# Altium PCB Aquarium_LED_Driver.PcbDoc
Units mil, origin at the board's own origin, x right, y up, seen from the top; angles counter-clockwise.
Board outline 3670 x 2255 mil, 2 copper layers (Top Layer, Bottom Layer); 96 components, 64 nets, 255 pads, 183 vias.
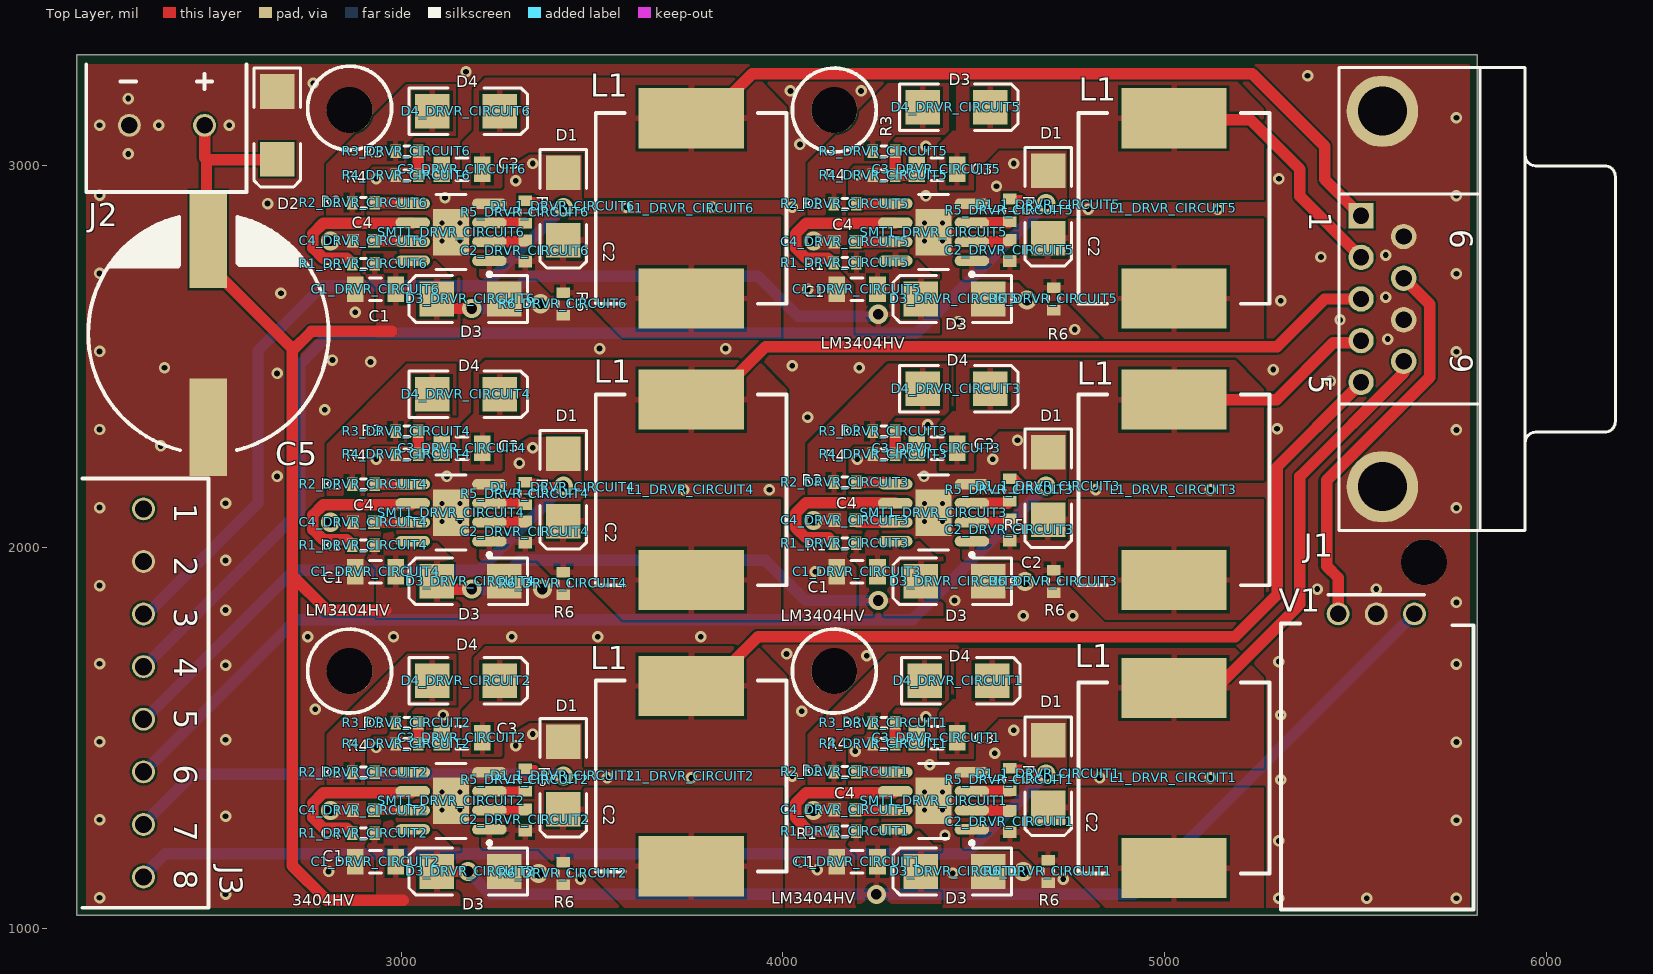
[diagram p0: Top Layer view]
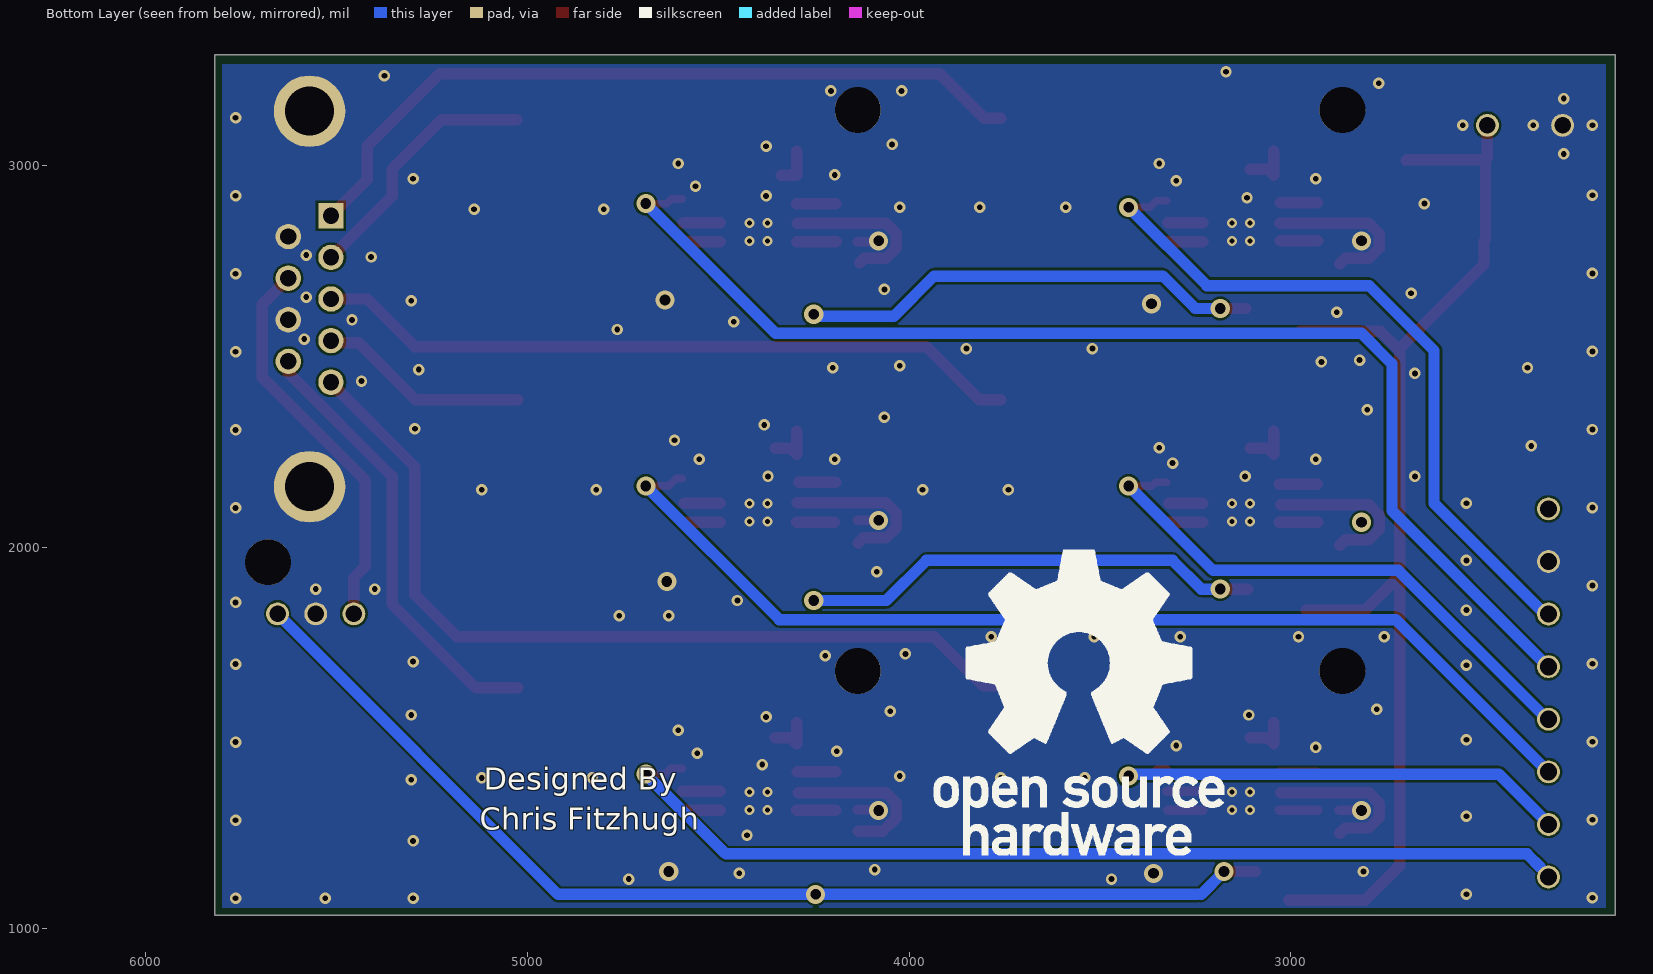
[diagram p1: Bottom Layer view, seen from below]

## Layer stack, top to bottom
Top Layer: signal copper 1.4
Dielectric: dielectric 12.6, FR-4, Dk 4.8
Bottom Layer: signal copper 1.4

## Board outline
2150,3290 2150,1035 5820,1035 5820,3290

## Design rules (kind name [scope] priority, off if disabled: settings)
Clearance "Stitching GND" [IsStitchingVia and InNet('GND') vs (IsVia and (Not IsStitchingVia)) Or IsPad] p1: gap=10
Clearance [All] p2: gap=6
PlaneConnect [All] p1: planeconnectstyle=Direct reliefexpansion=20 reliefentries=4 reliefconductorwidth=10 reliefairgap=10
PolygonConnect PolygonConnect_GND [InNet('GND') vs InNet('GND')] p1: connectstyle=Direct reliefconductorwidth=10 reliefentries=4 polygonreliefangle="90 Angle" airgapwidth=10
PolygonConnect [All] p2: connectstyle=Relief reliefconductorwidth=15 reliefentries=4 polygonreliefangle="90 Angle" airgapwidth=8
RoomDefinition Aquarium_LED_Driver [InComponentClass('Aquarium_LED_Driver')] p1: confinementstyle=ConfineIn formatcopy=TRUE lockcomponents=FALSE outline 2150,1035 6215,1035 6215,3290 2150,3290
RoomDefinition DRVR_CIRCUIT2 [InComponentClass('DRVR_CIRCUIT2')] p2: confinementstyle=ConfineIn formatcopy=TRUE lockcomponents=FALSE outline 4020,1074.96 4020,1750 2755,1750 2755,1074.96
RoomDefinition DRVR_CIRCUIT4 [InComponentClass('DRVR_CIRCUIT4')] p3: confinementstyle=ConfineIn formatcopy=TRUE lockcomponents=FALSE outline 4020,1810 4020,2479.96 2755,2479.96 2755,1810
RoomDefinition DRVR_CIRCUIT3 [InComponentClass('DRVR_CIRCUIT3')] p4: confinementstyle=ConfineIn formatcopy=TRUE lockcomponents=FALSE outline 5285,1814.96 5285,2479.96 4020,2479.96 4020,1814.96
RoomDefinition DRVR_CIRCUIT1 [InComponentClass('DRVR_CIRCUIT1')] p5: confinementstyle=ConfineIn formatcopy=TRUE lockcomponents=FALSE outline 5285,1074.96 5285,1719.96 4020,1719.96 4020,1074.96
RoomDefinition DRVR_CIRCUIT6 [InComponentClass('DRVR_CIRCUIT6')] p6: confinementstyle=ConfineIn formatcopy=TRUE lockcomponents=FALSE outline 4020,2562.4 4020,3264.96 2750,3264.96 2750,2562.4
RoomDefinition DRVR_CIRCUIT5 [InComponentClass('DRVR_CIRCUIT5')] p7: confinementstyle=ConfineIn formatcopy=TRUE lockcomponents=FALSE outline 5285,2562.4 5285,3264.96 4020,3264.96 4020,2562.4
RoutingTopology [All] p1: topology=Horizontal
RoutingVias [All] p1: holewidth=28 width=50 viastyle="Through Hole" minholewidth=13 minwidth=30 maxholewidth=40 maxwidth=70
SolderMaskExpansion [All] p1: expansion=4
Width [All] p1: maxlimit=40 minlimit=6 preferedwidth=10 minimp=50.000000 maximp=50.000000 favimp=50.000000
26 further rules are at their usual default settings.

## Classes and differential pairs
channel class DRVR_CIRCUIT: DRVR_CIRCUIT1 DRVR_CIRCUIT2 DRVR_CIRCUIT3 DRVR_CIRCUIT4 DRVR_CIRCUIT5 DRVR_CIRCUIT6
net class LED[1..6]: LED1 LED2 LED3 LED4 LED5 LED6
net class DIM[1..6]: DIM1 DIM2 DIM3 DIM4 DIM5 DIM6
component class DRVR_CIRCUIT6: C1_DRVR_CIRCUIT6 C2_DRVR_CIRCUIT6 C3_DRVR_CIRCUIT6 C4_DRVR_CIRCUIT6 D1_1_DRVR_CIRCUIT6 D3_DRVR_CIRCUIT6 D4_DRVR_CIRCUIT6 L1_DRVR_CIRCUIT6 R1_DRVR_CIRCUIT6 R2_DRVR_CIRCUIT6 R3_DRVR_CIRCUIT6 R4_DRVR_CIRCUIT6 R5_DRVR_CIRCUIT6 R6_DRVR_CIRCUIT6 SMT1_DRVR_CIRCUIT6
component class DRVR_CIRCUIT5: C1_DRVR_CIRCUIT5 C2_DRVR_CIRCUIT5 C3_DRVR_CIRCUIT5 C4_DRVR_CIRCUIT5 D1_1_DRVR_CIRCUIT5 D3_DRVR_CIRCUIT5 D4_DRVR_CIRCUIT5 L1_DRVR_CIRCUIT5 R1_DRVR_CIRCUIT5 R2_DRVR_CIRCUIT5 R3_DRVR_CIRCUIT5 R4_DRVR_CIRCUIT5 R5_DRVR_CIRCUIT5 R6_DRVR_CIRCUIT5 SMT1_DRVR_CIRCUIT5
component class DRVR_CIRCUIT4: C3_DRVR_CIRCUIT4 D1_1_DRVR_CIRCUIT4 D4_DRVR_CIRCUIT4 L1_DRVR_CIRCUIT4 R3_DRVR_CIRCUIT4 R4_DRVR_CIRCUIT4
component class DRVR_CIRCUIT3: C1_DRVR_CIRCUIT3 C2_DRVR_CIRCUIT3 C3_DRVR_CIRCUIT3 C4_DRVR_CIRCUIT3 D1_1_DRVR_CIRCUIT3 D3_DRVR_CIRCUIT3 D4_DRVR_CIRCUIT3 L1_DRVR_CIRCUIT3 R1_DRVR_CIRCUIT3 R2_DRVR_CIRCUIT3 R3_DRVR_CIRCUIT3 R4_DRVR_CIRCUIT3 R5_DRVR_CIRCUIT3 R6_DRVR_CIRCUIT3 SMT1_DRVR_CIRCUIT3
component class DRVR_CIRCUIT1: C1_DRVR_CIRCUIT1 C2_DRVR_CIRCUIT1 C3_DRVR_CIRCUIT1 C4_DRVR_CIRCUIT1 D1_1_DRVR_CIRCUIT1 D3_DRVR_CIRCUIT1 D4_DRVR_CIRCUIT1 L1_DRVR_CIRCUIT1 R1_DRVR_CIRCUIT1 R2_DRVR_CIRCUIT1 R3_DRVR_CIRCUIT1 R4_DRVR_CIRCUIT1 R5_DRVR_CIRCUIT1 R6_DRVR_CIRCUIT1 SMT1_DRVR_CIRCUIT1
component class Aquarium_LED_Driver: C5 D2 J1 J2 J3 V1

## Components (designator, comment, footprint, x,y, rotation, side; value= is the part's Value field where it differs from the comment)
C1_DRVR_CIRCUIT1 "C1" C1206 4195,1175.55 r0 top (schematic designator C1)
C1_DRVR_CIRCUIT2 "C1" C1206 2932.99,1175.55 r0 top (schematic designator C1)
C1_DRVR_CIRCUIT3 "C1" C1206 4195,1935.55 r0 top (schematic designator C1)
C1_DRVR_CIRCUIT4 "C1" C1206 2932.99,1935.55 r0 top (schematic designator C1)
C1_DRVR_CIRCUIT5 "C1" C1206 4195,2675.55 r0 top (schematic designator C1)
C1_DRVR_CIRCUIT6 "C1" C1206 2932.99,2675.55 r0 top (schematic designator C1)
C2_DRVR_CIRCUIT1 "C2" 1608[0603] 4595,1280.43 r270 top (schematic designator C2)
C2_DRVR_CIRCUIT2 "C2" 1608[0603] 3325,1284.96 r270 top (schematic designator C2)
C2_DRVR_CIRCUIT3 "C2" 1608[0603] 4595,2044.96 r270 top (schematic designator C2)
C2_DRVR_CIRCUIT4 "C2" 1608[0603] 3325,2039.96 r270 top (schematic designator C2)
C2_DRVR_CIRCUIT5 "C2" 1608[0603] 4595,2777.4 r270 top (schematic designator C2)
C2_DRVR_CIRCUIT6 "C2" 1608[0603] 3325,2776.26 r270 top (schematic designator C2)
C3_DRVR_CIRCUIT1 "C3" C1206 4403.58,1499.96 r0 top (schematic designator C3)
C3_DRVR_CIRCUIT2 "C3" C1206 3160,1499.96 r0 top (schematic designator C3)
C3_DRVR_CIRCUIT3 "C3" C1206 4403.58,2258.54 r0 top (schematic designator C3)
C3_DRVR_CIRCUIT4 "C3" C1206 3160,2258.54 r0 top (schematic designator C3)
C3_DRVR_CIRCUIT5 "C3" C1206 4403.58,2989.96 r0 top (schematic designator C3)
C3_DRVR_CIRCUIT6 "C3" C1206 3160,2989.96 r0 top (schematic designator C3)
C4_DRVR_CIRCUIT1 "C4" 1608[0603] 4163.5,1311.38 r0 top (schematic designator C4)
C4_DRVR_CIRCUIT2 "C4" 1608[0603] 2901.5,1309.96 r0 top (schematic designator C4)
C4_DRVR_CIRCUIT3 "C4" 1608[0603] 4163.5,2069.96 r0 top (schematic designator C4)
C4_DRVR_CIRCUIT4 "C4" 1608[0603] 2901.5,2064.96 r0 top (schematic designator C4)
C4_DRVR_CIRCUIT5 "C4" 1608[0603] 4163.5,2799.96 r0 top (schematic designator C4)
C4_DRVR_CIRCUIT6 "C4" 1608[0603] 2901.5,2802.4 r0 top (schematic designator C4)
C5 "EEV-FK1H102M" EEV-FK1H102M 2495,2560 r0 top
D1_1_DRVR_CIRCUIT1 "D1" SMB 4695,1405.43 r270 top (schematic designator D1_1)
D1_1_DRVR_CIRCUIT2 "D1" SMB 3425,1401.1 r270 top (schematic designator D1_1)
D1_1_DRVR_CIRCUIT3 "D1" SMB 4695,2159.96 r270 top (schematic designator D1_1)
D1_1_DRVR_CIRCUIT4 "D1" SMB 3425,2156.1 r270 top (schematic designator D1_1)
D1_1_DRVR_CIRCUIT5 "D1" SMB 4695,2897.4 r270 top (schematic designator D1_1)
D1_1_DRVR_CIRCUIT6 "D1" SMB 3425,2892.4 r270 top (schematic designator D1_1)
D2 "Tranzorb" SMB 2675,3105 r270 top
D3_DRVR_CIRCUIT1 "D3" SMB 4450,1149.96 r180 top (schematic designator D3)
D3_DRVR_CIRCUIT2 "D3" SMB 3181.81,1149.96 r180 top (schematic designator D3)
D3_DRVR_CIRCUIT3 "D3" SMB 4450,1909.96 r180 top (schematic designator D3)
D3_DRVR_CIRCUIT4 "D3" SMB 3181.81,1909.96 r180 top (schematic designator D3)
D3_DRVR_CIRCUIT5 "D3" SMB 4450,2649.96 r180 top (schematic designator D3)
D3_DRVR_CIRCUIT6 "D3" SMB 3181.81,2649.96 r180 top (schematic designator D3)
D4_DRVR_CIRCUIT1 "D4" SMB 4460,1649.96 r0 top (schematic designator D4)
D4_DRVR_CIRCUIT2 "D4" SMB 3170,1649.96 r0 top (schematic designator D4)
D4_DRVR_CIRCUIT3 "D4" SMB 4455,2414.96 r0 top (schematic designator D4)
D4_DRVR_CIRCUIT4 "D4" SMB 3170,2399.96 r0 top (schematic designator D4)
D4_DRVR_CIRCUIT5 "D3" SMB 4455,3152.4 r0 top (schematic designator D4)
D4_DRVR_CIRCUIT6 "D4" SMB 3170,3142.4 r0 top (schematic designator D4)
J1 "D Connector 9" DSUB1.385-2H9 5945,2650 r270 top
J2 "282836-2" 282836-2 2485,3105 r180 top
J3 "284391-8" 284391-8 2325,2100 r270 top
L1_DRVR_CIRCUIT1 "L1" SRR1208-151YLCT-ND 5025,1394.96 r90 top (schematic designator L1)
L1_DRVR_CIRCUIT2 "L1" SRR1208-151YLCT-ND 3760,1399.96 r90 top (schematic designator L1)
L1_DRVR_CIRCUIT3 "L1" SRR1208-151YLCT-ND 5025,2149.96 r90 top (schematic designator L1)
L1_DRVR_CIRCUIT4 "L1" SRR1208-151YLCT-ND 3760,2149.96 r90 top (schematic designator L1)
L1_DRVR_CIRCUIT5 "L1" SRR1208-151YLCT-ND 5025,2887.4 r90 top (schematic designator L1)
L1_DRVR_CIRCUIT6 "L1" SRR1208-151YLCT-ND 3760,2887.4 r90 top (schematic designator L1)
R1_DRVR_CIRCUIT1 "R1" J1-0603 4163.5,1254.96 r0 top (schematic designator R1)
R1_DRVR_CIRCUIT2 "R1" J1-0603 2901.5,1249.96 r0 top (schematic designator R1)
R1_DRVR_CIRCUIT3 "R1" J1-0603 4163.5,2009.96 r0 top (schematic designator R1)
R1_DRVR_CIRCUIT4 "R1" J1-0603 2901.5,2004.96 r0 top (schematic designator R1)
R1_DRVR_CIRCUIT5 "R1" J1-0603 4163.5,2745 r0 top (schematic designator R1)
R1_DRVR_CIRCUIT6 "R1" J1-0603 2901.5,2742.4 r0 top (schematic designator R1)
R2_DRVR_CIRCUIT1 "R2" J1-0603 4163.5,1411.38 r180 top (schematic designator R2)
R2_DRVR_CIRCUIT2 "R2" J1-0603 2901.5,1409.96 r180 top (schematic designator R2)
R2_DRVR_CIRCUIT3 "R2" J1-0603 4163.5,2169.96 r180 top (schematic designator R2)
R2_DRVR_CIRCUIT4 "R2" J1-0603 2901.5,2164.96 r180 top (schematic designator R2)
R2_DRVR_CIRCUIT5 "R2" J1-0603 4163.5,2899.96 r180 top (schematic designator R2)
R2_DRVR_CIRCUIT6 "R2" J1-0603 2901.5,2902.4 r180 top (schematic designator R2)
R3_DRVR_CIRCUIT1 "R3" J1-0603 4265,1539.96 r0 top (schematic designator R3)
R3_DRVR_CIRCUIT2 "R3" J1-0603 3015,1539.96 r0 top (schematic designator R3)
R3_DRVR_CIRCUIT3 "R3" J1-0603 4265,2303.54 r0 top (schematic designator R3)
R3_DRVR_CIRCUIT4 "R3" J1-0603 3015,2303.54 r0 top (schematic designator R3)
R3_DRVR_CIRCUIT5 "R3" J1-0603 4265,3037.4 r0 top (schematic designator R3)
R3_DRVR_CIRCUIT6 "R3" J1-0603 3015,3037.4 r0 top (schematic designator R3)
R4_DRVR_CIRCUIT1 "R4" J1-0603 4265,1484.21 r0 top (schematic designator R4)
R4_DRVR_CIRCUIT2 "R4" J1-0603 3015,1484.21 r0 top (schematic designator R4)
R4_DRVR_CIRCUIT3 "R4" J1-0603 4265,2242.79 r0 top (schematic designator R4)
R4_DRVR_CIRCUIT4 "R4" J1-0603 3015,2242.79 r0 top (schematic designator R4)
R4_DRVR_CIRCUIT5 "R4" J1-0603 4265,2974.21 r0 top (schematic designator R4)
R4_DRVR_CIRCUIT6 "R4" J1-0603 3015,2974.21 r0 top (schematic designator R4)
R5_DRVR_CIRCUIT1 "R5" J1-0603 4595,1390.43 r90 top (schematic designator R5)
R5_DRVR_CIRCUIT2 "R5" J1-0603 3325,1389.96 r90 top (schematic designator R5)
R5_DRVR_CIRCUIT3 "R5" J1-0603 4595,2149.96 r90 top (schematic designator R5)
R5_DRVR_CIRCUIT4 "R5" J1-0603 3325,2139.96 r90 top (schematic designator R5)
R5_DRVR_CIRCUIT5 "R5" J1-0603 4595,2882.4 r90 top (schematic designator R5)
R5_DRVR_CIRCUIT6 "R5" J1-0603 3325,2877.4 r90 top (schematic designator R5)
R6_DRVR_CIRCUIT1 "R6" J1-0603 4695,1149.96 r90 top (schematic designator R6)
R6_DRVR_CIRCUIT2 "R6" J1-0603 3425,1144.96 r90 top (schematic designator R6)
R6_DRVR_CIRCUIT3 "R6" J1-0603 4710,1909.96 r90 top (schematic designator R6)
R6_DRVR_CIRCUIT4 "R6" J1-0603 3425,1904.96 r90 top (schematic designator R6)
R6_DRVR_CIRCUIT5 "R6" J1-0603 4710,2649.96 r90 top (schematic designator R6)
R6_DRVR_CIRCUIT6 "R6" J1-0603 3425,2637.4 r90 top (schematic designator R6)
SMT1_DRVR_CIRCUIT1 "LM3404HV" MRA08B_M 4395,1335.08 r180 top (schematic designator SMT1)
SMT1_DRVR_CIRCUIT2 "3404HV" MRA08B_M 3131.02,1335.08 r180 top (schematic designator SMT1)
SMT1_DRVR_CIRCUIT3 "LM3404HV" MRA08B_M 4395,2090.08 r180 top (schematic designator SMT1)
SMT1_DRVR_CIRCUIT4 "LM3404HV" MRA08B_M 3131.02,2090.08 r180 top (schematic designator SMT1)
SMT1_DRVR_CIRCUIT5 "LM3404HV" MRA08B_M 4395,2825.08 r180 top (schematic designator SMT1)
SMT1_DRVR_CIRCUIT6 "LM3404HVMR/NOPB" MRA08B_M 3131.02,2825.08 r180 top (schematic designator SMT1)
V1 "V7812W-500R" V7812W-500R 5555,1825 r0 top

## Footprints (in the part's own frame and the unit in brackets; to place one, negate y for a bottom-side part, rotate by r counter-clockwise, add the part's x,y. Pads: shape width x height; smd on the part's side, far side on the other; paste and mask are expansions set on the pad)
1608[0603] [mm] "Chip Capacitor, Body 1.6x0.8mm, IPC High Density"
  rect 0.8x0.9 smd: 1(-0.7,0) 2(0.7,0)
  body extent -0.87,-0.48 0.87,0.48, height 1.3
282836-2 [mil] "Board Mount w/Interlock,  Low Profile,  5.0 mm Centerline,  Side Wire Entry"
  round 60 hole 43: 1(0,0) 2(197,0)
  silkscreen extent -110,-160 310,175, body extent -95,-160 295,160, height 394
284391-8 [mil] "8-Pos Eurostyle Terminal Block"
  round 60 hole 45.28: 1(0,0) 2(137.8,0) 3(275.59,0) 4(413.39,0) 5(551.18,0) 6(688.98,0) 7(826.77,0) 8(964.57,0)
  silkscreen extent -80,-160 1045,170, body extent -75,-160 1040,165, height 496
C1206 [mm] "Chip Capacitor, Body 3.2x1.6mm, IPC High Density"
  rect 1.1x1.7 smd: 1(-1.35,0) 2(1.35,0)
  silkscreen extent -0.4,-0.75 0.4,0.75, body extent -1.7,-0.9 1.7,0.9, height 1.3
DSUB1.385-2H9 [mm] "Connector; D Subminiature; 9 Position; Right Angle; Pitch 1.385 mm"
  rect 1.69x1.69 hole 1.09: 1(-5.54,-10.92)
  round 1.69 hole 1.09: 2(-2.77,-10.92) 3(0,-10.92) 4(2.77,-10.92) 5(5.54,-10.92) 6(-4.155,-8.08) 7(-1.385,-8.08) 8(1.385,-8.08) 9(4.155,-8.08)
  round 4.76 hole 3.26: 10(-12.495,-9.5) 11(12.495,-9.5)
  silkscreen extent -15.4,-12.4 15.4,6
EEV-FK1H102M [mm] "Aluminum Electrolitic Capcitor"
  rect 2.5x6.5 smd: 1(0,-6.25) 2(0,6.25)
  silkscreen extent -8,-7.78 8,7.76, body extent -8.51,-8.25 8.51,8.25, height 16.5
J1-0603 [mm] "Chip Resistor, Body 1.6x0.8mm, IPC High Density"
  rect 0.7x0.9 smd: 1(-0.75,0) 2(0.75,0)
  silkscreen extent -0.2,-0.35 0.2,0.35, body extent -0.85,-0.48 0.85,0.48, height 0.9
MRA08B_M [mm] "SOIC, 8-Leads, Body 4.9x3.9mm, Pitch 1.27mm, Exposed Pad, IPC Low Density"
  oval 2.3x0.7 smd: 1(-2.55,1.905) 2(-2.55,0.635) 3(-2.55,-0.635) 4(-2.55,-1.905) 5(2.55,-1.905) 6(2.55,-0.635) 7(2.55,0.635) 8(2.55,1.905)
  rect 2.4x3.1 smd: 9(0,0)
  silkscreen extent -2.68,-2.5 1,2.93, body extent -2,-2.5 2,2.5, height 1.68
SMB [mm] "DO-214-AA/SMB; 2 C-Bend Leads; Body 5.3 x 3.6 mm, inc. leads (LxW)"
  rect 2.3x2.3 smd: 1(-2.25,0) 2(2.25,0)
  silkscreen extent -3.8,-1.55 4.1,1.55
SRR1208-151YLCT-ND [mm]
  rect 4x7 smd: 1(-6,0) 2(6,0)
  silkscreen extent -6.35,-6.35 6.35,6.35, body extent -6.22,-6.22 6.22,6.22, height 8.5
V7812W-500R [mil] "CONVERT DC/DC REG 12V 500MA 3SIP"
  round 60 hole 43: 1(100,0) 2(0,0) 3(-100,0)
  silkscreen extent -250,-775 255,50, body extent -228,-742 228,-55, height 354

## Part data
C1_DRVR_CIRCUIT1 C1_DRVR_CIRCUIT2 C1_DRVR_CIRCUIT3 C1_DRVR_CIRCUIT4 C1_DRVR_CIRCUIT5 C1_DRVR_CIRCUIT6 C2_DRVR_CIRCUIT1 C2_DRVR_CIRCUIT2 C2_DRVR_CIRCUIT3 C2_DRVR_CIRCUIT4 C2_DRVR_CIRCUIT5 C2_DRVR_CIRCUIT6 C3_DRVR_CIRCUIT1 C3_DRVR_CIRCUIT2 C3_DRVR_CIRCUIT3 C3_DRVR_CIRCUIT4 C3_DRVR_CIRCUIT5 C3_DRVR_CIRCUIT6 C4_DRVR_CIRCUIT1 C4_DRVR_CIRCUIT2 C4_DRVR_CIRCUIT3 C4_DRVR_CIRCUIT4 C4_DRVR_CIRCUIT5 C4_DRVR_CIRCUIT6: library part "Cap Semi", "Capacitor (Semiconductor SIM Model)"
C5: "Aluminum Electrolytic Capcitor"
D1_1_DRVR_CIRCUIT1 D1_1_DRVR_CIRCUIT2 D1_1_DRVR_CIRCUIT3 D1_1_DRVR_CIRCUIT4 D1_1_DRVR_CIRCUIT5 D1_1_DRVR_CIRCUIT6: library part "D Schottky", "Schottky Diode"
D2: "Transient Voltage Suppression (TVS) Diode"
D3_DRVR_CIRCUIT1 D3_DRVR_CIRCUIT2 D3_DRVR_CIRCUIT3 D3_DRVR_CIRCUIT4 D3_DRVR_CIRCUIT5 D3_DRVR_CIRCUIT6 D4_DRVR_CIRCUIT1 D4_DRVR_CIRCUIT2 D4_DRVR_CIRCUIT3 D4_DRVR_CIRCUIT4 D4_DRVR_CIRCUIT5 D4_DRVR_CIRCUIT6: library part "D Zener", "Zener Diode"
J1: "Receptacle Assembly, 9 Position, Right Angle"
J2: "Board Mount w/Interlock,  Low Profile,  5.0 mm Centerline,  Side Wire Entry"
J3: "8-Pos Eurostyle Terminal Block"
L1_DRVR_CIRCUIT1 L1_DRVR_CIRCUIT2 L1_DRVR_CIRCUIT3 L1_DRVR_CIRCUIT4 L1_DRVR_CIRCUIT5 L1_DRVR_CIRCUIT6: library part SRR1208-151YLCT-ND
R1_DRVR_CIRCUIT1 R1_DRVR_CIRCUIT2 R1_DRVR_CIRCUIT3 R1_DRVR_CIRCUIT4 R1_DRVR_CIRCUIT5 R1_DRVR_CIRCUIT6 R2_DRVR_CIRCUIT1 R2_DRVR_CIRCUIT2 R2_DRVR_CIRCUIT3 R2_DRVR_CIRCUIT4 R2_DRVR_CIRCUIT5 R2_DRVR_CIRCUIT6 R3_DRVR_CIRCUIT1 R3_DRVR_CIRCUIT2 R3_DRVR_CIRCUIT3 R3_DRVR_CIRCUIT4 R3_DRVR_CIRCUIT5 R3_DRVR_CIRCUIT6 R4_DRVR_CIRCUIT1 R4_DRVR_CIRCUIT2 R4_DRVR_CIRCUIT3 R4_DRVR_CIRCUIT4 R4_DRVR_CIRCUIT5 R4_DRVR_CIRCUIT6 R5_DRVR_CIRCUIT1 R5_DRVR_CIRCUIT2 R5_DRVR_CIRCUIT3 R5_DRVR_CIRCUIT4 R5_DRVR_CIRCUIT5 R5_DRVR_CIRCUIT6 R6_DRVR_CIRCUIT1 R6_DRVR_CIRCUIT2 R6_DRVR_CIRCUIT3 R6_DRVR_CIRCUIT4 R6_DRVR_CIRCUIT5 R6_DRVR_CIRCUIT6: library part Res3, "Resistor"
SMT1_DRVR_CIRCUIT1 SMT1_DRVR_CIRCUIT2 SMT1_DRVR_CIRCUIT3 SMT1_DRVR_CIRCUIT4 SMT1_DRVR_CIRCUIT5: library part LM3404HVMR/NOPB, "1.0A Constant Current Buck Regulator for High Power LED Drivers, 8-pin PSOP, Pb-Free"
SMT1_DRVR_CIRCUIT6: "1.0A Constant Current Buck Regulator for High Power LED Drivers, 8-pin PSOP, Pb-Free"

## Free pads (board coordinates)
  round 120 hole 120: 1(2865,1675) 1(2865,3145) 1(4135,1675) 1(4135,3145) 1(5680,1960)

## Via types
v1: diameter 30, hole 15, Top Layer to Bottom Layer, 135 vias
v2: diameter 50, hole 28, Top Layer to Bottom Layer, 24 vias
v3: diameter 25.98, hole 12.99, Top Layer to Bottom Layer, tented top, 24 vias

## Nets (pads, with @x,y where several pads share a name; then routed paths per layer and width w, separated by ;. In a path a pad name is that pad's centre, name@x,y a point inside that pad or via, vN(x,y) a via of type N, cw(c..) or ccw(c..) an arc to the next point about the centre after c; other vN are vias at no path point)
+12: J1.7 V1.3 | length 1032
  Top Layer w30: V1.3 5455,1920 5425,1950 5425,2175 5695,2445 5695,2636.42 J1.7
DIM1: J3.8 R5_DRVR_CIRCUIT1.2 | length 2544.5
  Top Layer w20: R5_DRVR_CIRCUIT1.2 4625,1419.96 4640,1404.96 v2(4690,1404.96)
  Bottom Layer w30: 2345,1160 2381,1196 4480,1196 ; 4482.52,1197.48 v2(4690,1404.96)
DIM2: J3.7 R5_DRVR_CIRCUIT2.2 | length 1223.4
  Top Layer w20: R5_DRVR_CIRCUIT2.2 3350.47,1419.49 3370,1399.96 v2(3425,1399.96)
  Bottom Layer w30: J3.7@2341.61,1291.61 2455,1405 v2@3410,1405
DIM3: J3.6 R5_DRVR_CIRCUIT3.2 | length 2753.3
  Top Layer w20: R5_DRVR_CIRCUIT3.2 4610.47,2179.49 4630,2159.96 v2(4690,2159.96)
  Bottom Layer w30: J3.6@2343.01,1428.01 2725,1810 4340.04,1810 v2(4690,2159.96)
DIM4: J3.5 R5_DRVR_CIRCUIT4.2 | length 1460.4
  Top Layer w20: R5_DRVR_CIRCUIT4.2 3355.47,2169.49 3365,2159.96 v2(3425,2159.96)
  Bottom Layer w30: J3.5@2334.41,1539.41 2334.41,1554.41 2718.78,1938.78 3203.82,1938.78 v2(3425,2159.96)
DIM5: J3.4 R5_DRVR_CIRCUIT5.2 | length 3167.8
  Top Layer w20: R5_DRVR_CIRCUIT5.2 4623.03,2911.93 4635,2899.96 v2(4690,2899.96)
  Bottom Layer w30: J3.4@2343.31,1703.31 2735,2095 2735,2479.96 2815,2559.96 4350,2559.96 v2(4690,2899.96)
DIM6: J3.3 R5_DRVR_CIRCUIT6.2 | length 1880
  Top Layer w20: R5_DRVR_CIRCUIT6.2 3353.03,2906.93 3370,2889.96 v2(3425,2889.96)
  Bottom Layer w30: J3.3@2329.7,1819.7 2625,2115 2625,2515 2795,2685 3220.04,2685 v2(3425,2889.96)
GND: C1_DRVR_CIRCUIT1.1 C1_DRVR_CIRCUIT2.1 C1_DRVR_CIRCUIT3.1 C1_DRVR_CIRCUIT4.1 C1_DRVR_CIRCUIT5.1 C1_DRVR_CIRCUIT6.1 C4_DRVR_CIRCUIT1.1 C4_DRVR_CIRCUIT2.1 C4_DRVR_CIRCUIT3.1 C4_DRVR_CIRCUIT4.1 C4_DRVR_CIRCUIT5.1 C4_DRVR_CIRCUIT6.1 C5.1 D1_1_DRVR_CIRCUIT1.1 D1_1_DRVR_CIRCUIT2.1 D1_1_DRVR_CIRCUIT3.1 D1_1_DRVR_CIRCUIT4.1 D1_1_DRVR_CIRCUIT5.1 D1_1_DRVR_CIRCUIT6.1 D2.1 D3_DRVR_CIRCUIT1.1 D3_DRVR_CIRCUIT2.1 D3_DRVR_CIRCUIT3.1 D3_DRVR_CIRCUIT4.1 D3_DRVR_CIRCUIT5.1 D3_DRVR_CIRCUIT6.1 J1.6 J1.8 J1.10 J1.11 J2.2 J3.2 pad.1 R4_DRVR_CIRCUIT1.1 R4_DRVR_CIRCUIT2.1 R4_DRVR_CIRCUIT3.1 R4_DRVR_CIRCUIT4.1 R4_DRVR_CIRCUIT5.1 R4_DRVR_CIRCUIT6.1 R6_DRVR_CIRCUIT1.1 R6_DRVR_CIRCUIT2.1 R6_DRVR_CIRCUIT3.1 R6_DRVR_CIRCUIT4.1 R6_DRVR_CIRCUIT5.1 R6_DRVR_CIRCUIT6.1 SMT1_DRVR_CIRCUIT1.4 SMT1_DRVR_CIRCUIT1.9 SMT1_DRVR_CIRCUIT2.4 SMT1_DRVR_CIRCUIT2.9 SMT1_DRVR_CIRCUIT3.4 SMT1_DRVR_CIRCUIT3.9 SMT1_DRVR_CIRCUIT4.4 SMT1_DRVR_CIRCUIT4.9 SMT1_DRVR_CIRCUIT5.4 SMT1_DRVR_CIRCUIT5.9 SMT1_DRVR_CIRCUIT6.4 SMT1_DRVR_CIRCUIT6.9 V1.2 | length 222.9
  Top Layer w25: v2(2815,1309.96) C4_DRVR_CIRCUIT2.1 ; v2(4080,2069.96) C4_DRVR_CIRCUIT3.1 ; v2@4081.42,1311.38 C4_DRVR_CIRCUIT1.1 ; v2@4082.44,2799.96 C4_DRVR_CIRCUIT5.1
  other v1: 5300,1080 5530,1080 5765,1080 2210,1081 2540,1090 3470,1130 4735,1130 4445,1145 2810,1150 4090,1155 5300,1230 4425,1245 5765,1284.5 2210,1285.5 2540,1295 5305,1390 3540,1395 3760,1395 4830,1395 5120,1395 4025,1400 4385,1430 4555,1460 4190,1465 2935,1475 3300,1480 5765,1489 2210,1490 2540,1495 3345,1510 4605,1520 4375,1555 3110,1560 5305,1560 4050,1570 2775,1575 2540,1690 2210,1694.5 5765,1693.5 5300,1700 4220,1715 4010,1720 2755,1765 2980,1765 3290,1765 3515,1765 3785,1765 4630,1820 4760,1820 2540,1835 5765,1855 4450,1860 5400,1890 5555,1890 2210,1899 4085,1935 2540,1965 5765,2102.5 2210,2103.5 2540,2115 3740,2150 3965,2150 4820,2150 5120,2150 2675,2185 3120,2185 4370,2185 3310,2220 2935,2230 4195,2230 4550,2230 3345,2260 2370,2265 4615,2280 5765,2307 2210,2308 5295,2310 4380,2320 4065,2340 2800,2360 5435,2435 2675,2455 5285,2465 2380,2470 4200,2470 4025,2475 2920,2485 2820,2490 2210,2512.5 5765,2511.5 3520,2520 3850,2520 5585,2545 4765,2570 4460,2590 5460,2595 2880,2615 5305,2645 5580,2655 2685,2665 4065,2675 5765,2716 2210,2717 5410,2760 5580,2765 4800,2885 5140,2885 3590,2890 3815,2890 4025,2890 2650,2900 3115,2915 4375,2920 5765,2920.5 2210,2921.5 4560,2945 3300,2960 2935,2965 5300,2965 4195,2975 3345,3005 4605,3005 2285,3030 4375,3050 4045,3055 2210,3105 2365,3105 2550,3105 5765,3125 2285,3175 4020,3195 4205,3195 2770,3215 5375,3235 3170,3245
  other v2: 3360,1144.96 4630,1149.96 4080,1309.96 3370,1890 4635,1909.96 3365,2637.4 4640,2647.4 2815,2802.4 4080,2802.4
  other v3: 3107.4,1311.46 3154.65,1311.46 4371.38,1311.46 4418.62,1311.46 3107.4,1358.7 3154.65,1358.7 4371.38,1358.7 4418.62,1358.7 3107.4,2066.46 3154.65,2066.46 4371.38,2066.46 4418.62,2066.46 3107.4,2113.7 3154.65,2113.7 4371.38,2113.7 4418.62,2113.7 3107.4,2801.46 3154.65,2801.46 4371.38,2801.46 4418.62,2801.46 3107.4,2848.7 3154.65,2848.7 4371.38,2848.7 4418.62,2848.7
IO1: J3.1
LED1: C3_DRVR_CIRCUIT1.2 D4_DRVR_CIRCUIT1.2 J1.9 L1_DRVR_CIRCUIT1.2 | length 1169.7
  Top Layer w30: L1_DRVR_CIRCUIT1.2 5136.22,1631.18 5355,1849.96 5355,2185 5626.89,2456.89 J1.9
LED2: C3_DRVR_CIRCUIT2.2 D4_DRVR_CIRCUIT2.2 J1.5 L1_DRVR_CIRCUIT2.2 | length 2274.8
  Top Layer w30: L1_DRVR_CIRCUIT2.2 3806.22,1636.18 3935,1764.96 5185,1764.96 5295,1874.96 5295,2210 5498.39,2413.39 J1.5@5516.61,2413.39
LED3: C3_DRVR_CIRCUIT3.2 D4_DRVR_CIRCUIT3.2 J1.4 L1_DRVR_CIRCUIT3.2 | length 545.8
  Top Layer w30: L1_DRVR_CIRCUIT3.2 5293.74,2386.18 5442.56,2535 J1.4@5509.13,2535
LED4: C3_DRVR_CIRCUIT4.2 D4_DRVR_CIRCUIT4.2 J1.3 L1_DRVR_CIRCUIT4.2 | length 1864.4
  Top Layer w30: L1_DRVR_CIRCUIT4.2 3816.22,2386.18 3955,2524.96 5294.96,2524.96 5420,2650 J1.3
LED5: C3_DRVR_CIRCUIT5.2 D4_DRVR_CIRCUIT5.2 J1.2 L1_DRVR_CIRCUIT5.2 | length 677.4
  Top Layer w30: L1_DRVR_CIRCUIT5.2@5028.66,3119.96 5225,3119.96 5355,2989.96 5355,2919.13 J1.2
LED6: C3_DRVR_CIRCUIT6.2 D4_DRVR_CIRCUIT6.2 J1.1 L1_DRVR_CIRCUIT6.2 | length 2008.1
  Top Layer w30: L1_DRVR_CIRCUIT6.2 3803.66,3123.62 3920,3239.96 5230.04,3239.96 5420,3050 5420,2963.19 J1.1
NetC2_DRVR_CIRCUIT1_1: C2_DRVR_CIRCUIT1.1 SMT1_DRVR_CIRCUIT1.2 | length 97.5
  Top Layer w30: SMT1_DRVR_CIRCUIT1.2 C2_DRVR_CIRCUIT1.1@4592.91,1310.08
NetC2_DRVR_CIRCUIT1_2: C2_DRVR_CIRCUIT1.2 D1_1_DRVR_CIRCUIT1.2 L1_DRVR_CIRCUIT1.1 R6_DRVR_CIRCUIT1.2 SMT1_DRVR_CIRCUIT1.1
NetC2_DRVR_CIRCUIT2_1: C2_DRVR_CIRCUIT2.1 SMT1_DRVR_CIRCUIT2.2 | length 91.1
  Top Layer w25: SMT1_DRVR_CIRCUIT2.2 C2_DRVR_CIRCUIT2.1@3322.56,1310.08
NetC2_DRVR_CIRCUIT2_2: C2_DRVR_CIRCUIT2.2 D1_1_DRVR_CIRCUIT2.2 L1_DRVR_CIRCUIT2.1 R6_DRVR_CIRCUIT2.2 SMT1_DRVR_CIRCUIT2.1
NetC2_DRVR_CIRCUIT3_1: C2_DRVR_CIRCUIT3.1 SMT1_DRVR_CIRCUIT3.2 | length 92.2
  Top Layer w30: SMT1_DRVR_CIRCUIT3.2 C2_DRVR_CIRCUIT3.1@4587.56,2065.08
NetC2_DRVR_CIRCUIT3_2: C2_DRVR_CIRCUIT3.2 D1_1_DRVR_CIRCUIT3.2 L1_DRVR_CIRCUIT3.1 R6_DRVR_CIRCUIT3.2 SMT1_DRVR_CIRCUIT3.1
NetC2_DRVR_CIRCUIT4_1: C2_DRVR_CIRCUIT4.1 SMT1_DRVR_CIRCUIT4.2 | length 91.1
  Top Layer w30: SMT1_DRVR_CIRCUIT4.2 C2_DRVR_CIRCUIT4.1@3322.56,2065.08
NetC2_DRVR_CIRCUIT4_2: C2_DRVR_CIRCUIT4.2 D1_1_DRVR_CIRCUIT4.2 L1_DRVR_CIRCUIT4.1 R6_DRVR_CIRCUIT4.2 SMT1_DRVR_CIRCUIT4.1
NetC2_DRVR_CIRCUIT5_1: C2_DRVR_CIRCUIT5.1 SMT1_DRVR_CIRCUIT5.2 | length 94.7
  Top Layer w30: SMT1_DRVR_CIRCUIT5.2 C2_DRVR_CIRCUIT5.1@4590.12,2800.08
NetC2_DRVR_CIRCUIT5_2: C2_DRVR_CIRCUIT5.2 D1_1_DRVR_CIRCUIT5.2 L1_DRVR_CIRCUIT5.1 R6_DRVR_CIRCUIT5.2 SMT1_DRVR_CIRCUIT5.1
NetC2_DRVR_CIRCUIT6_1: C2_DRVR_CIRCUIT6.1 SMT1_DRVR_CIRCUIT6.2 | length 89.8
  Top Layer w30: SMT1_DRVR_CIRCUIT6.2 C2_DRVR_CIRCUIT6.1@3321.26,2800.08
NetC2_DRVR_CIRCUIT6_2: C2_DRVR_CIRCUIT6.2 D1_1_DRVR_CIRCUIT6.2 L1_DRVR_CIRCUIT6.1 R6_DRVR_CIRCUIT6.2 SMT1_DRVR_CIRCUIT6.1
NetC3_DRVR_CIRCUIT1_1: C3_DRVR_CIRCUIT1.1 R3_DRVR_CIRCUIT1.2 R4_DRVR_CIRCUIT1.2 | length 118.2
  Top Layer w30: R3_DRVR_CIRCUIT1.2 R4_DRVR_CIRCUIT1.2 4310.28,1499.96 C3_DRVR_CIRCUIT1.1
NetC3_DRVR_CIRCUIT2_1: C3_DRVR_CIRCUIT2.1 R3_DRVR_CIRCUIT2.2 R4_DRVR_CIRCUIT2.2 | length 124.6
  Top Layer w30: R3_DRVR_CIRCUIT2.2 R4_DRVR_CIRCUIT2.2 3060.28,1499.96 C3_DRVR_CIRCUIT2.1@3106.85,1499.96
NetC3_DRVR_CIRCUIT3_1: C3_DRVR_CIRCUIT3.1 R3_DRVR_CIRCUIT3.2 R4_DRVR_CIRCUIT3.2 | length 123.2
  Top Layer w30: R3_DRVR_CIRCUIT3.2 R4_DRVR_CIRCUIT3.2 4310.28,2258.54 C3_DRVR_CIRCUIT3.1
NetC3_DRVR_CIRCUIT4_1: C3_DRVR_CIRCUIT4.1 R3_DRVR_CIRCUIT4.2 R4_DRVR_CIRCUIT4.2 | length 129.6
  Top Layer w30: R3_DRVR_CIRCUIT4.2 R4_DRVR_CIRCUIT4.2 3060.28,2258.54 C3_DRVR_CIRCUIT4.1
NetC3_DRVR_CIRCUIT5_1: C3_DRVR_CIRCUIT5.1 R3_DRVR_CIRCUIT5.2 R4_DRVR_CIRCUIT5.2 | length 103.3
  Top Layer w30: R3_DRVR_CIRCUIT5.2 R4_DRVR_CIRCUIT5.2 C3_DRVR_CIRCUIT5.1@4334.69,2974.21
NetC3_DRVR_CIRCUIT6_1: C3_DRVR_CIRCUIT6.1 R3_DRVR_CIRCUIT6.2 R4_DRVR_CIRCUIT6.2 | length 132
  Top Layer w30: R3_DRVR_CIRCUIT6.2 R4_DRVR_CIRCUIT6.2 3060.28,2989.96 C3_DRVR_CIRCUIT6.1
NetC4_DRVR_CIRCUIT1_2: C4_DRVR_CIRCUIT1.2 SMT1_DRVR_CIRCUIT1.7 | length 102.2
  Top Layer w30: C4_DRVR_CIRCUIT1.2@4192.36,1310.08 SMT1_DRVR_CIRCUIT1.7
NetC4_DRVR_CIRCUIT2_2: C4_DRVR_CIRCUIT2.2 SMT1_DRVR_CIRCUIT2.7 | length 101.5
  Top Layer w25: C4_DRVR_CIRCUIT2.2@2929.18,1310.08 SMT1_DRVR_CIRCUIT2.7
NetC4_DRVR_CIRCUIT3_2: C4_DRVR_CIRCUIT3.2 SMT1_DRVR_CIRCUIT3.7 | length 98.7
  Top Layer w30: C4_DRVR_CIRCUIT3.2@4195.94,2065.08 SMT1_DRVR_CIRCUIT3.7
NetC4_DRVR_CIRCUIT4_2: C4_DRVR_CIRCUIT4.2 SMT1_DRVR_CIRCUIT4.7 | length 101.5
  Top Layer w30: C4_DRVR_CIRCUIT4.2@2929.17,2065.08 SMT1_DRVR_CIRCUIT4.7
NetC4_DRVR_CIRCUIT5_2: C4_DRVR_CIRCUIT5.2 SMT1_DRVR_CIRCUIT5.7 | length 103.4
  Top Layer w30: C4_DRVR_CIRCUIT5.2@4191.18,2800.08 SMT1_DRVR_CIRCUIT5.7
NetC4_DRVR_CIRCUIT6_2: C4_DRVR_CIRCUIT6.2 SMT1_DRVR_CIRCUIT6.7 | length 99.3
  Top Layer w30: C4_DRVR_CIRCUIT6.2 SMT1_DRVR_CIRCUIT6.7@3028.31,2802.4
NetD4_DRVR_CIRCUIT1_1: D4_DRVR_CIRCUIT1.1 R2_DRVR_CIRCUIT1.2 R3_DRVR_CIRCUIT1.1
NetD4_DRVR_CIRCUIT2_1: D4_DRVR_CIRCUIT2.1 R2_DRVR_CIRCUIT2.2 R3_DRVR_CIRCUIT2.1
NetD4_DRVR_CIRCUIT3_1: D4_DRVR_CIRCUIT3.1 R2_DRVR_CIRCUIT3.2 R3_DRVR_CIRCUIT3.1
NetD4_DRVR_CIRCUIT4_1: D4_DRVR_CIRCUIT4.1 R2_DRVR_CIRCUIT4.2 R3_DRVR_CIRCUIT4.1
NetD4_DRVR_CIRCUIT5_1: D4_DRVR_CIRCUIT5.1 R2_DRVR_CIRCUIT5.2 R3_DRVR_CIRCUIT5.1
NetD4_DRVR_CIRCUIT6_1: D4_DRVR_CIRCUIT6.1 R2_DRVR_CIRCUIT6.2 R3_DRVR_CIRCUIT6.1
NetR1_DRVR_CIRCUIT1_1: R1_DRVR_CIRCUIT1.1 SMT1_DRVR_CIRCUIT1.6 | length 420.6
  Top Layer w30: R1_DRVR_CIRCUIT1.1 4069.95,1254.96 4034,1290.91 4034,1329.01 4060.95,1355.96 SMT1_DRVR_CIRCUIT1.6@4290.49,1355.96
NetR1_DRVR_CIRCUIT2_1: R1_DRVR_CIRCUIT2.1 SMT1_DRVR_CIRCUIT2.6 | length 426.7
  Top Layer w30: R1_DRVR_CIRCUIT2.1 2857.97,1263.96 2795.95,1263.96 2769,1290.91 2769,1329.01 2795.95,1355.96 SMT1_DRVR_CIRCUIT2.6@3026.51,1355.96
NetR1_DRVR_CIRCUIT3_1: R1_DRVR_CIRCUIT3.1 SMT1_DRVR_CIRCUIT3.6 | length 425.9
  Top Layer w30: R1_DRVR_CIRCUIT3.1 4119.98,2023.96 4060.95,2023.96 4034,2050.91 4034,2089.01 4060.95,2115.96 SMT1_DRVR_CIRCUIT3.6@4293.73,2115.96
NetR1_DRVR_CIRCUIT4_1: R1_DRVR_CIRCUIT4.1 SMT1_DRVR_CIRCUIT4.6 | length 426.7
  Top Layer w30: R1_DRVR_CIRCUIT4.1 2857.97,2018.96 2795.95,2018.96 2769,2045.91 2769,2084.01 2795.95,2110.96 SMT1_DRVR_CIRCUIT4.6@3026.51,2110.96
NetR1_DRVR_CIRCUIT5_1: R1_DRVR_CIRCUIT5.1 SMT1_DRVR_CIRCUIT5.6 | length 420.1
  Top Layer w30: R1_DRVR_CIRCUIT5.1@4129.7,2744.23 4117.54,2756.4 4060.95,2756.4 4034,2783.35 4034,2821.45 4060.95,2848.4 SMT1_DRVR_CIRCUIT5.6@4292.93,2848.4
NetR1_DRVR_CIRCUIT6_1: R1_DRVR_CIRCUIT6.1 SMT1_DRVR_CIRCUIT6.6 | length 429.1
  Top Layer w30: R1_DRVR_CIRCUIT6.1 2857.97,2756.4 2795.95,2756.4 2769,2783.35 2769,2821.45 2795.95,2848.4 SMT1_DRVR_CIRCUIT6.6@3028.95,2848.4
NetR2_DRVR_CIRCUIT1_1: R2_DRVR_CIRCUIT1.1 SMT1_DRVR_CIRCUIT1.5 | length 100.3
  Top Layer w30: R2_DRVR_CIRCUIT1.1 SMT1_DRVR_CIRCUIT1.5@4293.31,1411.38
NetR2_DRVR_CIRCUIT2_1: R2_DRVR_CIRCUIT2.1 SMT1_DRVR_CIRCUIT2.5 | length 99.5
  Top Layer w25: R2_DRVR_CIRCUIT2.1@2931.14,1410.08 SMT1_DRVR_CIRCUIT2.5
NetR2_DRVR_CIRCUIT3_1: R2_DRVR_CIRCUIT3.1 SMT1_DRVR_CIRCUIT3.5 | length 96.7
  Top Layer w30: R2_DRVR_CIRCUIT3.1 SMT1_DRVR_CIRCUIT3.5@4289.73,2169.96
NetR2_DRVR_CIRCUIT4_1: R2_DRVR_CIRCUIT4.1 SMT1_DRVR_CIRCUIT4.5 | length 99.5
  Top Layer w30: R2_DRVR_CIRCUIT4.1 SMT1_DRVR_CIRCUIT4.5@3030.51,2164.96
NetR2_DRVR_CIRCUIT5_1: R2_DRVR_CIRCUIT5.1 SMT1_DRVR_CIRCUIT5.5 | length 101.5
  Top Layer w30: R2_DRVR_CIRCUIT5.1 SMT1_DRVR_CIRCUIT5.5@4294.49,2899.96
NetR2_DRVR_CIRCUIT6_1: R2_DRVR_CIRCUIT6.1 SMT1_DRVR_CIRCUIT6.5 | length 97.3
  Top Layer w30: R2_DRVR_CIRCUIT6.1 SMT1_DRVR_CIRCUIT6.5@3028.31,2902.4
NetR5_DRVR_CIRCUIT1_1: R5_DRVR_CIRCUIT1.1 SMT1_DRVR_CIRCUIT1.3 | length 98.8
  Top Layer w30: SMT1_DRVR_CIRCUIT1.3 R5_DRVR_CIRCUIT1.1@4594.17,1360.08
NetR5_DRVR_CIRCUIT2_1: R5_DRVR_CIRCUIT2.1 SMT1_DRVR_CIRCUIT2.3 | length 93.2
  Top Layer w25: SMT1_DRVR_CIRCUIT2.3 R5_DRVR_CIRCUIT2.1@3324.65,1360.08
NetR5_DRVR_CIRCUIT3_1: R5_DRVR_CIRCUIT3.1 SMT1_DRVR_CIRCUIT3.3 | length 94.3
  Top Layer w30: SMT1_DRVR_CIRCUIT3.3 R5_DRVR_CIRCUIT3.1@4589.65,2115.08
NetR5_DRVR_CIRCUIT4_1: R5_DRVR_CIRCUIT4.1 SMT1_DRVR_CIRCUIT4.3 | length 88.9
  Top Layer w30: SMT1_DRVR_CIRCUIT4.3 R5_DRVR_CIRCUIT4.1@3320.35,2115.08
NetR5_DRVR_CIRCUIT5_1: R5_DRVR_CIRCUIT5.1 SMT1_DRVR_CIRCUIT5.3 | length 96.8
  Top Layer w30: SMT1_DRVR_CIRCUIT5.3 R5_DRVR_CIRCUIT5.1@4592.21,2850.08
NetR5_DRVR_CIRCUIT6_1: R5_DRVR_CIRCUIT6.1 SMT1_DRVR_CIRCUIT6.3 | length 91.4
  Top Layer w30: SMT1_DRVR_CIRCUIT6.3 R5_DRVR_CIRCUIT6.1@3322.79,2850.08
VCC: C1_DRVR_CIRCUIT1.2 C1_DRVR_CIRCUIT2.2 C1_DRVR_CIRCUIT3.2 C1_DRVR_CIRCUIT4.2 C1_DRVR_CIRCUIT5.2 C1_DRVR_CIRCUIT6.2 C5.2 D2.2 D3_DRVR_CIRCUIT1.2 D3_DRVR_CIRCUIT2.2 D3_DRVR_CIRCUIT3.2 D3_DRVR_CIRCUIT4.2 D3_DRVR_CIRCUIT5.2 D3_DRVR_CIRCUIT6.2 J2.1 R1_DRVR_CIRCUIT1.2 R1_DRVR_CIRCUIT2.2 R1_DRVR_CIRCUIT3.2 R1_DRVR_CIRCUIT4.2 R1_DRVR_CIRCUIT5.2 R1_DRVR_CIRCUIT6.2 SMT1_DRVR_CIRCUIT1.8 SMT1_DRVR_CIRCUIT2.8 SMT1_DRVR_CIRCUIT3.8 SMT1_DRVR_CIRCUIT4.8 SMT1_DRVR_CIRCUIT5.8 SMT1_DRVR_CIRCUIT6.8 V1.1 | length 8407.8
  Top Layer w25: D2.2@2696.42,3014.96 D2.2@2700,3011.38
  Top Layer w30: 2485,3019.96 J2.1 ; C5.2@2490,2806.06 2490,3014.96 D2.2@2696.42,3014.96 ; C5.2@2493.94,2801.06 2493.94,2741.06 2717.52,2517.48 2765,2564.96 2975,2564.96 ; 2715,2525 2715,1165 2805,1074.96 3005,1074.96 ; 2717.48,1922.48 2805,1834.96 2960,1834.96 ; D3_DRVR_CIRCUIT2.2 v2(3175.04,1149.96) ; D3_DRVR_CIRCUIT4.2@3113.19,1890 v2(3185,1890) ; D3_DRVR_CIRCUIT6.2@3118.19,2625 v2(3185,2625)
  Bottom Layer w30: v2(3175.04,1149.96) 3235,1090 ; v2(3185,1890) 3235,1890 3310,1965 3955,1965 4060,1860 v2(4250,1860) ; v2(3185,2625) 3250,2625 3335,2710 3935,2710 4040,2605 v2@4250,2605 ; 3245,1090 v2(4245,1090) ; v2@4265,1090 4920,1090 V1.1
  other v2: 4250,2610
copper on no net:
  other v2: 2815,2064.96

## Polygon pours and split planes (outlines as drawn)
NetD4_DRVR_CIRCUIT2_1 on Top Layer "Top Layer-No Net" (solid, pour order 25): 2805,1374.96 2905,1374.96 2905,1484.96 2905,1489.96 2925,1509.96 3015,1509.96 3015,1564.96 3035,1584.96 3050,1584.96 3145,1584.96 3145,1719.96 3015,1719.96 2805,1509.96 2805,1374.96
LED2 on Top Layer "Top Layer-No Net" (solid, pour order 18): 3160,1570.31 3190,1601.16 3190,1709.12 3210,1729.68 3220,1739.96 3935,1739.96 3990,1683.41 4010,1662.85 4010,1424.96 3480,1424.96 3480,1544.96 3335,1544.96 3264.79,1502.53 3265.09,1449.96 3160,1449.96
VCC on Top Layer "Top Layer-No Net" (solid, remove dead copper, pour order 14): 2935,1059.96 3155,1059.96 3155,1215.04 3134.6,1215.04 3063.31,1284.96 2900,1284.96 2900,1225.04 2935,1189.96
VCC on Top Layer "Top Layer-No Net" (solid, remove dead copper, pour order 14): 2935,1814.96 3155,1814.96 3155,1970.04 3134.6,1970.04 3063.31,2039.96 2900,2039.96 2900,1980.04 2935,1944.96
NetC2_DRVR_CIRCUIT4_2 on Top Layer "Top Layer-No Net" (solid, pour order 6): 3205,2034.96 3350,2034.96 3355,2034.96 3370,2049.96 3375,2054.96 3375,2124.96 3995,2124.96 3995,1809.96 3580,1809.96 3480,1909.96 3410,1909.96 3405,1914.96 3355,1964.96 3210,1964.96 3205,1969.96 3205,2034.96
NetC2_DRVR_CIRCUIT2_2 on Top Layer "Top Layer-No Net" (solid, pour order 6): 3210,1279.96 3355,1279.96 3360,1279.96 3375,1294.96 3380,1299.96 3380,1369.96 4000,1369.96 4000,1054.96 3585,1054.96 3485,1154.96 3415,1154.96 3410,1159.96 3360,1209.96 3215,1209.96 3210,1214.96 3210,1279.96
GND on Top Layer "Top Layer-No Net" (solid, pour order 37): 2175,3265 5795,3265 5800,3270 5800,1055 2175,1055
VCC on Top Layer "Top Layer-No Net" (solid, remove dead copper, pour order 14): 4190.83,2560.04 4410.83,2560.04 4410.83,2715.12 4390.43,2715.12 4319.14,2785.04 4155.83,2785.04 4155.83,2725.12 4190.83,2690.04
VCC on Top Layer "Top Layer-No Net" (solid, remove dead copper, pour order 14): 4195,1064.96 4415,1064.96 4415,1220.04 4394.6,1220.04 4323.31,1289.96 4160,1289.96 4160,1230.04 4195,1194.96
VCC on Top Layer "Top Layer-No Net" (solid, remove dead copper, pour order 14): 4200,1820 4420,1820 4420,1975.08 4399.6,1975.08 4328.31,2045 4165,2045 4165,1985.08 4200,1950
NetD4_DRVR_CIRCUIT1_1 on Top Layer "Top Layer-No Net" (solid, pour order 25): 4065,1375 4165,1375 4165,1490 4185,1510 4275,1510 4275,1565 4295,1585 4435,1585 4435,1720 4275,1720 4065,1510
NetD4_DRVR_CIRCUIT3_1 on Top Layer "Top Layer-No Net" (solid, pour order 25): 4065,2135 4165,2135 4165,2250 4185,2270 4275,2270 4275,2325 4295,2345 4435,2345 4435,2480 4275,2480 4065,2270
NetD4_DRVR_CIRCUIT5_1 on Top Layer "Top Layer-No Net" (solid, pour order 25): 4065,2870 4165,2870 4165,2985 4185,3005 4275,3005 4275,3060 4295,3080 4435,3080 4435,3215 4275,3215 4065,3005
NetD4_DRVR_CIRCUIT6_1 on Top Layer "Top Layer-No Net" (solid, pour order 25): 2803.31,2867.56 2903.31,2867.56 2903.31,2977.56 2903.31,2982.56 2923.31,3002.56 3013.31,3002.56 3013.31,3057.56 3033.31,3077.56 3048.31,3077.56 3143.31,3077.56 3143.31,3212.56 3013.31,3212.56 2803.31,3002.56 2803.31,2867.56
NetD4_DRVR_CIRCUIT4_1 on Top Layer "Top Layer-No Net" (solid, pour order 25): 2804.65,2135 2904.65,2135 2904.65,2245 2904.65,2250 2924.65,2270 3014.65,2270 3014.65,2325 3034.65,2345 3049.65,2345 3144.65,2345 3144.65,2480 3014.65,2480 2804.65,2270 2804.65,2135
LED6 on Top Layer "Top Layer-No Net" (solid, pour order 18): 3160,3060.31 3190,3091.16 3190,3199.12 3210,3219.68 3220,3229.96 3935,3229.96 3990,3173.41 4010,3152.85 4010,2914.96 3480,2914.96 3480,3034.96 3335,3034.96 3264.79,2992.53 3265.09,2939.96 3160,2939.96
LED4 on Top Layer "Top Layer-No Net" (solid, pour order 18): 3160,2320.31 3190,2351.16 3190,2459.12 3210,2479.68 3220,2489.96 3935,2489.96 3990,2433.41 4010,2412.85 4010,2174.96 3480,2174.96 3480,2294.96 3335,2294.96 3264.79,2252.53 3265.09,2199.96 3160,2199.96
LED5 on Top Layer "Top Layer-No Net" (solid, pour order 18): 4410,3055.31 4445,3091.3 4455,3091.3 4455,3209.54 4460,3214.68 4470,3224.96 5185,3224.96 5240,3168.41 5260,3147.85 5260,2909.96 4750,2909.96 4750,3045.03 4565,3045.03 4560,3039.89 4500,2978.2 4500,2934.96 4410,2934.96
LED3 on Top Layer "Top Layer-No Net" (solid, pour order 18): 4410,2320.31 4445,2356.3 4455,2356.3 4455,2474.54 4460,2479.68 4470,2489.96 5185,2489.96 5240,2433.41 5260,2412.85 5260,2174.96 4750,2174.96 4750,2310.03 4565,2310.03 4560,2304.89 4500,2243.2 4500,2199.96 4410,2199.96
LED1 on Top Layer "Top Layer-No Net" (solid, pour order 18): 4410,1565.31 4445,1601.3 4455,1601.3 4455,1719.54 4460,1724.68 4470,1734.96 5185,1734.96 5240,1678.41 5260,1657.85 5260,1419.96 4750,1419.96 4750,1555.03 4565,1555.03 4560,1549.89 4500,1488.2 4500,1444.96 4410,1444.96
VCC on Top Layer "Top Layer-No Net" (solid, remove dead copper, pour order 14): 2935,2549.96 3155,2549.96 3155,2705.04 3134.6,2705.04 3063.31,2774.96 2900,2774.96 2900,2715.04 2935,2679.96
NetC2_DRVR_CIRCUIT6_2 on Top Layer "Top Layer-No Net" (solid, pour order 6): 3205,2774.96 3350,2774.96 3355,2774.96 3370,2789.96 3375,2794.96 3375,2864.96 3995,2864.96 3995,2549.96 3580,2549.96 3480,2649.96 3410,2649.96 3405,2654.96 3355,2704.96 3210,2704.96 3205,2709.96 3205,2774.96
NetC2_DRVR_CIRCUIT5_2 on Top Layer "Top Layer-No Net" (solid, pour order 6): 4470,2769.96 4615,2769.96 4620,2769.96 4635,2784.96 4640,2789.96 4640,2859.96 5260,2859.96 5260,2544.96 4845,2544.96 4745,2644.96 4675,2644.96 4670,2649.96 4620,2699.96 4475,2699.96 4470,2704.96 4470,2769.96
NetC2_DRVR_CIRCUIT3_2 on Top Layer "Top Layer-No Net" (solid, pour order 6): 4470,2034.96 4615,2034.96 4620,2034.96 4635,2049.96 4640,2054.96 4640,2124.96 5260,2124.96 5260,1809.96 4845,1809.96 4745,1909.96 4675,1909.96 4670,1914.96 4620,1964.96 4475,1964.96 4470,1969.96 4470,2034.96
NetC2_DRVR_CIRCUIT1_2 on Top Layer "Top Layer-No Net" (solid, pour order 6): 4470,1279.96 4615,1279.96 4620,1279.96 4635,1294.96 4640,1299.96 4640,1369.96 5260,1369.96 5260,1054.96 4845,1054.96 4745,1154.96 4675,1154.96 4670,1159.96 4620,1209.96 4475,1209.96 4470,1214.96 4470,1279.96
GND on Bottom Layer "Top Layer-No Net" (solid, pour order 39): 2175,3265 5800,3265 5800,1055 2175,1055

## Silkscreen, mask and mechanical layers (free items; w line width, h text height)
Top Overlay:
  circle w10: c4135,1675 r110
  circle w10: c4135,3145 r110
  circle w10: c2865,3150 r110
  circle w10: c2865,1675 r110
Bottom Overlay:
  drawing of 3322 lines, arcs and shapes, not listed
  text "Designed By" at 5115,1345 h100
  text "Chris Fitzhugh" at 5125,1240 h100

## Text inside footprints (layer, text, board x,y; h text height)
J1: Top Overlay "6" at 5749.13,2833.27 h59.06 r270; Top Overlay "9" at 5749.13,2506.1 h59.06 r270; Top Overlay "5" at 5379.06,2451.57 h59.06 r270; Top Overlay "1" at 5379.06,2877.95 h59.06 r270
J3: Top Overlay "1" at 2405,2115 h60 r270; Top Overlay "2" at 2405,1975 h60 r270; Top Overlay "3" at 2405,1840 h60 r270; Top Overlay "4" at 2405,1710 h60 r270; Top Overlay "5" at 2405,1575 h60 r270; Top Overlay "6" at 2405,1430 h60 r270; Top Overlay "7" at 2405,1280 h60 r270; Top Overlay "8" at 2405,1155 h60 r270